# EAGLE board DigBPM (EAGLE 6.5.0)
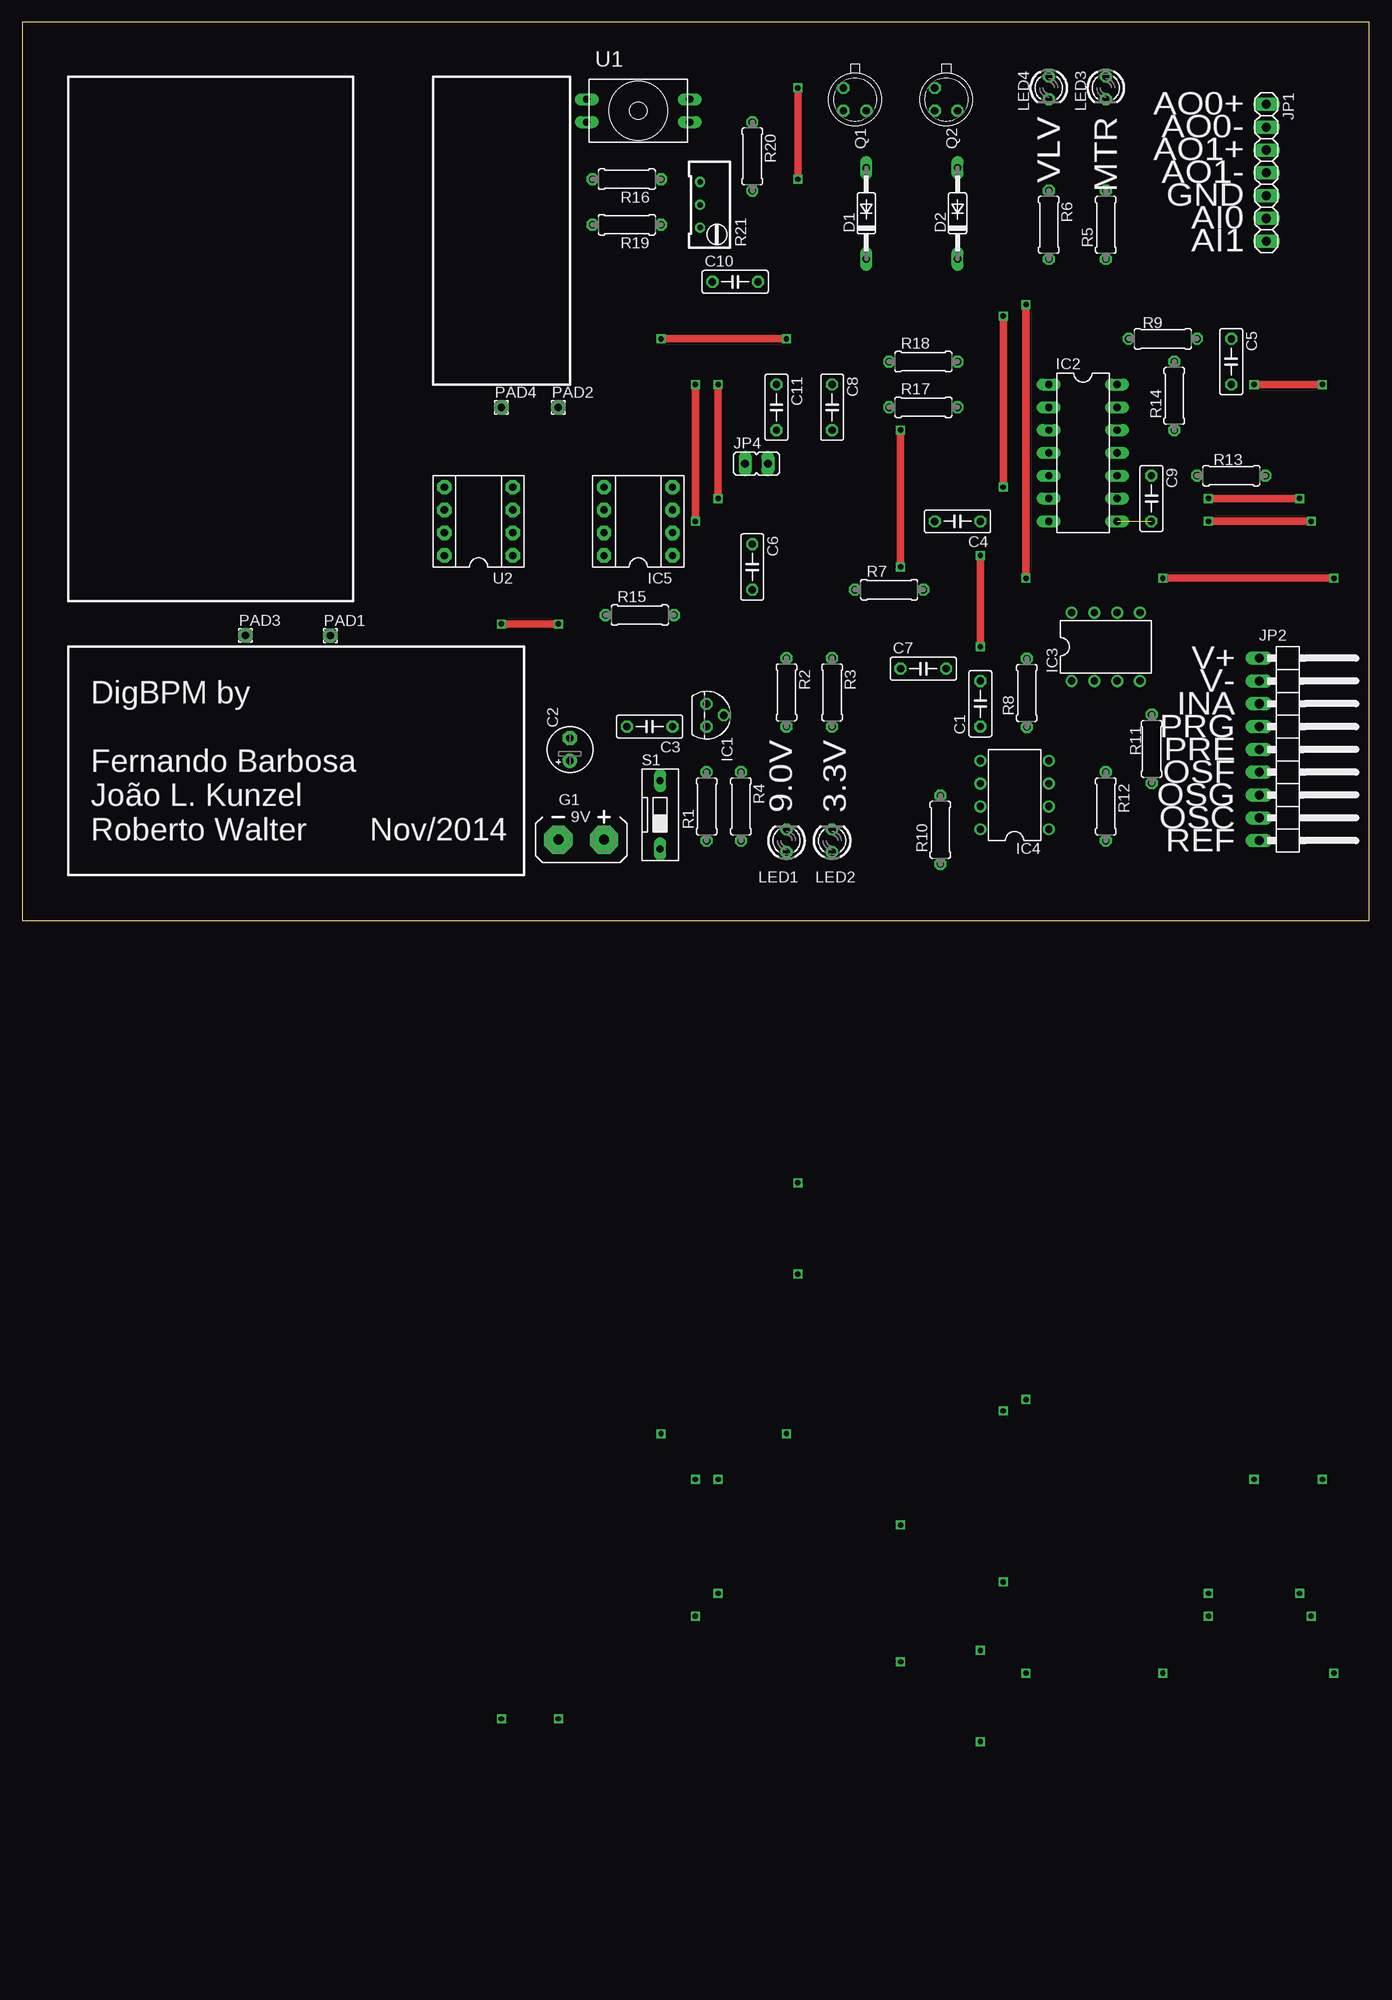
[diagram p0: board, top side]
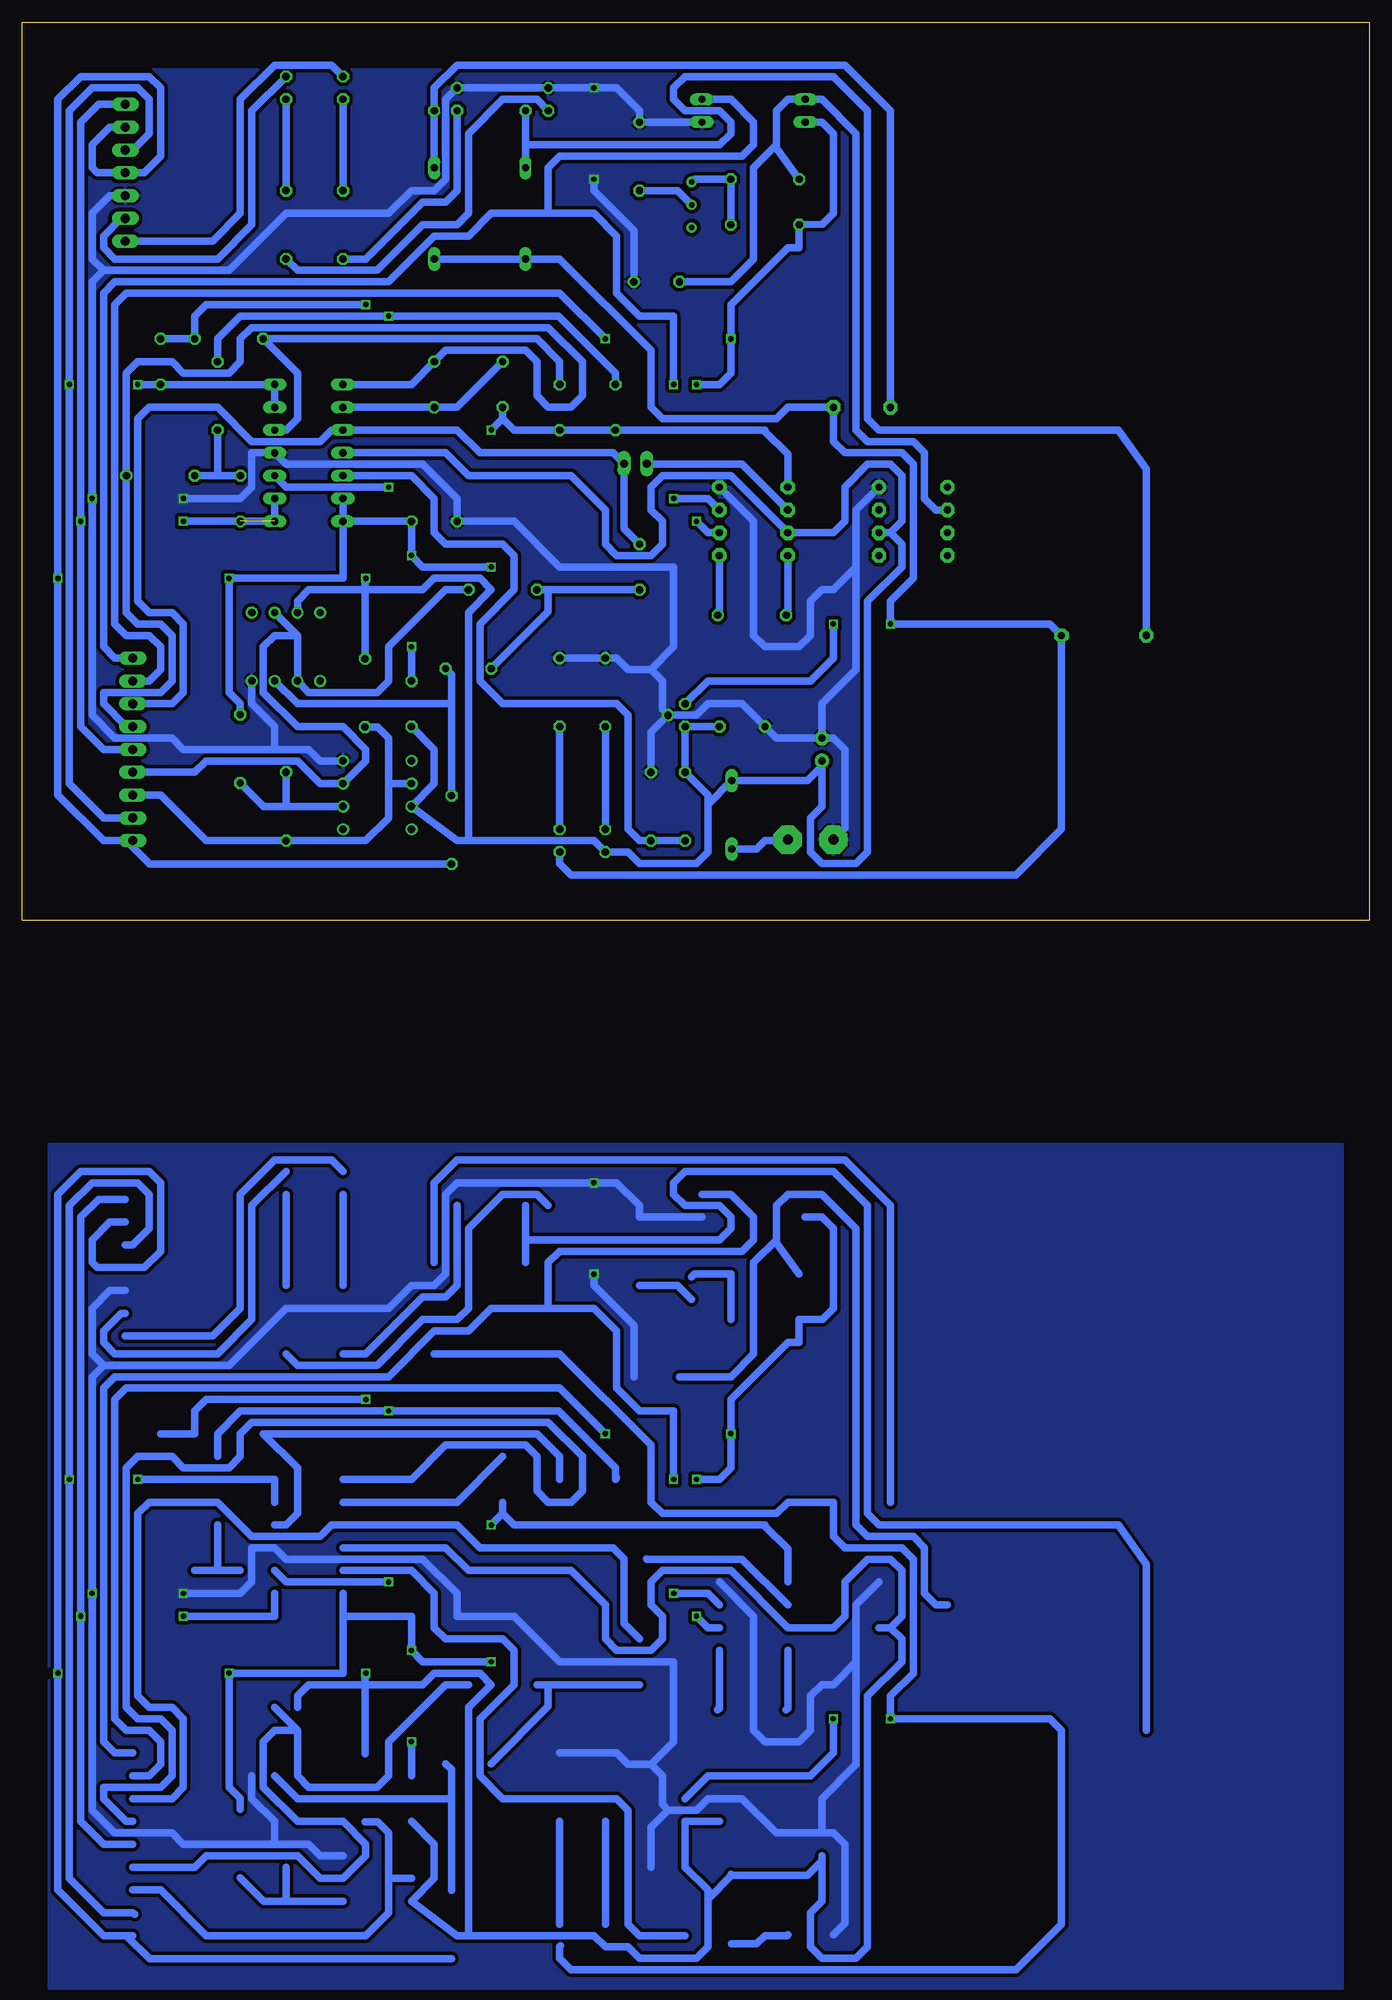
[diagram p1: board, bottom side, seen from below]

Size 150 x 100 mm. Coordinates in mm from the lower left corner, seen from the top.
Outline: 0,0 150,0 150,100 0,100 0,0
Copper layers (1*16): Top 0.035mm / dielectric 1.5mm / Bottom 0.035mm
Design rules "default *": minimum track width 32mil, minimum drill 32mil, track to track 16mil, track to pad 16mil, pad to pad 16mil, via to via 16mil, smd to smd 16mil, copper to edge 5mm, drill to drill 16mil, minimum pad ring 10mil, minimum via ring 8mil, stop-mask expansion 4mil, vias tented up to drill 0mil, thermal gap 10mil

## Footprints (pad centres in the part's own frame; a part is rotated, then mirrored left to right if it is on the bottom)
C050-025X075 = drill 0.813 octagon: 1 -2.54,0; 2 2.54,0
E2,5-5 = drill 0.813 pad 1.6: + -1.27,0 | drill 0.813 pad 1.6 octagon: - 1.27,0
DO35-10 = drill 0.813 long: A 5.08,0; C -5.08,0
AB9V = drill 1.118 pad 3.15 octagon: + 0,2.54; - 0,-2.54
TO92 = drill 0.813 octagon: 1 -1.27,0; 2 0,1.905; 3 1.27,0
DIL14 = drill 0.813 long: 1 -7.62,-3.81; 2 -5.08,-3.81; 3 -2.54,-3.81; 4 0,-3.81; 5 2.54,-3.81; 6 5.08,-3.81; 7 7.62,-3.81; 8 7.62,3.81; 9 5.08,3.81; 10 2.54,3.81; 11 0,3.81; 12 -2.54,3.81; 13 -5.08,3.81; 14 -7.62,3.81
DIL08 = drill 0.813 pad 1.27: 1 -3.81,-3.81; 2 -1.27,-3.81; 3 1.27,-3.81; 4 3.81,-3.81; 5 3.81,3.81; 6 1.27,3.81; 7 -1.27,3.81; 8 -3.81,3.81
DIL08' = drill 0.813 pad 1.6 octagon: 1 -3.81,-3.81; 2 -1.27,-3.81; 3 1.27,-3.81; 4 3.81,-3.81; 5 3.81,3.81; 6 1.27,3.81; 7 -1.27,3.81; 8 -3.81,3.81
1X07 = drill 1.016 long: 1 -7.62,0; 2 -5.08,0; 3 -2.54,0; 4 0,0; 5 2.54,0; 6 5.08,0; 7 7.62,0
1X09/90 = drill 1.016 long: 1 -10.16,-3.81; 2 -7.62,-3.81; 3 -5.08,-3.81; 4 -2.54,-3.81; 5 0,-3.81; 6 2.54,-3.81; 7 5.08,-3.81; 8 7.62,-3.81; 9 10.16,-3.81
JP1 = drill 0.914 long: 1 0,-1.27; 2 0,1.27
LED3MM = drill 0.813 octagon: A -1.27,0; K 1.27,0
1,6/0,8 = drill 0.813 pad 1.6 octagon: 1 0,0
TO18 = drill 0.813 octagon: 1 -1.27,-1.27; 2 1.27,-1.27; 3 1.27,1.27
0207/7 = drill 0.813 octagon: 1 -3.81,0; 2 3.81,0
RTRIM64W = drill 0.61: 1 1.27,-2.54; 2 1.27,0; 3 1.27,2.54
DS-01 = drill 0.813 long: 1 0,-3.81; 2 0,3.81
TBP_AN = drill 0.813 long: 1 -5.75,1.27; 2 -5.75,-1.27; 3 5.75,-1.27; 4 5.75,1.27

## Placement (x,y rotation side)
C1  100n  [C050-025X075]  106.68,24.13 90 top
C2  10u  [E2,5-5]  60.96,19.05 90 top
C3  100n  [C050-025X075]  69.85,21.59 180 top
C4  100n  [C050-025X075]  104.14,44.45 180 top
C5  100n  [C050-025X075]  134.62,62.23 270 top
C6  10u  [C050-025X075]  81.28,39.37 270 top
C7  10u  [C050-025X075]  100.33,28.04 0 top
C8  47n  [C050-025X075]  90.17,57.15 270 top
C9  100nF  [C050-025X075]  125.73,46.99 270 top
C10  100n  [C050-025X075]  79.38,71.12 0 top
C11  47nF  [C050-025X075]  83.97,57.15 270 top
D1  1N4148DO35-10  [DO35-10]  93.98,78.74 90 top
D2  1N4148DO35-10  [DO35-10]  104.14,78.74 90 top
G1  AB9V  [AB9V]  62.23,9 270 top
IC1  7805L  [TO92]  76.2,22.86 270 top
IC2  TL084P  [DIL14]  118.11,52.07 270 top
IC3  OP07Z  [DIL08]  120.65,30.48 0 top
IC4  OP07Z  [DIL08]  110.49,13.97 90 top
IC5  INA126P  [DIL08']  68.58,44.45 90 top
JP1  [1X07]  138.54,83.26 270 top
JP2  [1X09/90]  141.54,19.05 270 top
JP4  [JP1]  81.75,50.86 270 top
LED1  [LED3MM]  85.09,8.89 90 top
LED2  [LED3MM]  90.17,8.89 90 top
LED3  [LED3MM]  120.65,92.71 270 top
LED4  [LED3MM]  114.3,92.71 270 top
PAD1  [1,6/0,8]  34.29,31.73 0 top
PAD2  [1,6/0,8]  59.69,57.15 0 top
PAD3  [1,6/0,8]  24.84,31.75 0 top
PAD4  [1,6/0,8]  53.34,57.15 0 top
Q1  2N2222  [TO18]  92.71,91.44 270 top
Q2  2N2222  [TO18]  102.87,91.44 270 top
R1  470k  [0207/7]  76.2,12.7 90 top
R2  680  [0207/7]  85.09,25.4 270 top
R3  150  [0207/7]  90.17,25.4 270 top
R4  470K  [0207/7]  80.01,12.7 270 top
R5  330  [0207/7]  120.65,77.47 90 top
R6  330  [0207/7]  114.3,77.47 270 top
R7  27k  [0207/7]  96.52,36.83 0 top
R8  82k  [0207/7]  111.85,25.34 90 top
R9  150k  [0207/7]  127,64.77 180 top
R10  56k  [0207/7]  102.22,10.1 90 top
R11  1k  [0207/7]  125.76,19.11 270 top
R12  180k  [0207/7]  120.65,12.7 270 top
R13  82k  [0207/7]  134.62,49.53 180 top
R14  150k  [0207/7]  128.27,58.42 90 top
R15  1k  [0207/7]  68.76,34.01 0 top
R16  100k  [0207/7]  67.31,82.55 180 top
R17  100k  [0207/7]  100.33,57.15 0 top
R18  270k  [0207/7]  100.33,62.23 0 top
R19  470K  [0207/7]  67.31,77.47 180 top
R20  100k  [0207/7]  81.28,85.09 270 top
R21  20k  [RTRIM64W]  76.75,79.7 180 top
S1  [DS-01]  71.01,11.77 0 top
U1  TBPDANS005PG  [TBP_AN]  68.58,90.17 0 top
U2  REF02  [DIL08']  50.8,44.45 90 top

## Library data of the parts
C1-C11 R1-R21 = rcl
D1 D2 = diode
G1 = battery
IC1-IC4 = linear
IC5 = burr-brown; MF: TEXAS INSTRUMENT CONNECTORS; MPN: INA126P; OC_FARNELL: 1509595; OC_NEWARK: 74C9780
JP1 JP2 = pinhead
JP4 = jumper
LED1-LED4 = led
PAD1-PAD4 = wirepad
Q1 Q2 = transistor-npn
S1 = switch-dil; OC_FARNELL: unknown; OC_NEWARK: unknown
U1 = honeywell
U2 = custom

## Nets
4.5V: C1.2 C4.1 C8.2 C11.2 IC2.6 IC2.7 IC5.5 JP1.2 JP1.4 JP2.9 R10.1 R11.1 R17.1
+3V3: D1.C D2.C IC1.1 LED2.A PAD1.1 PAD2.1
+9V: C1.1 C2.+ C3.1 IC1.3 IC2.4 IC3.7 IC4.7 IC5.7 LED1.A R1.2 S1.2 U2.2
GND: C2.- C3.2 C4.2 C10.2 G1.- IC1.2 IC2.11 IC3.4 IC4.4 IC5.4 JP1.5 Q1.1 Q2.1 R2.1 R3.1 R4.1 R20.1 U1.3 U2.4
INA: C6.1 IC2.3 JP2.3 JP4.2
MTR: JP1.6 LED3.A
N$1: IC2.5 R1.1 R4.2
N$2: LED3.K R5.2
N$3: IC5.1 R15.2
N$4: IC5.8 R15.1
N$5: C11.1 IC2.10 R14.2
N$6: C9.1 R13.2 R14.1
N$8: IC5.6 JP4.1
N$9: C7.2 IC3.3 R10.2
N$10: C5.1 R8.2 R9.1
N$11: IC2.2 R17.2 R18.1
N$12: D2.A PAD4.1 Q2.3
N$13: LED4.K R6.1
N$17: C6.2 C7.1 R7.1
N$18: LED2.K R3.2
N$19: IC4.2 R11.2 R12.1
N$20: C8.1 IC2.12 R9.2
N$21: LED1.K R2.2
N$22: D1.A PAD3.1 Q1.3
N$23: G1.+ S1.1
N$24: Q1.2 R5.1
N$25: Q2.2 R6.2
N$26: R16.1 R19.1 R21.1
N$30: R20.2 R21.2
OSC: C5.2 IC2.13 IC2.14 JP1.3 JP2.8
OSF: IC3.2 IC3.6 IC4.3 JP2.6 R7.2
OSG: IC4.6 JP2.7 R8.1 R12.2
PRE: C9.2 IC2.8 IC2.9 JP1.1 JP2.5
PRG: IC2.1 JP2.4 R13.1 R18.2
V+: IC5.3 JP2.1 U1.4
V-: IC5.2 JP2.2 R19.2 U1.2
VCC: C10.1 R16.2 U1.1 U2.6
VLV: JP1.7 LED4.A

## Tracks (layer width: path | path; a pad name or v marks a point on that pad's centre or on a via)
4.5V  (via drill 0.6)
  Top 0.813: v127,38.1 v146.05,38.1 | v106.68,30.48 v106.68,40.64 | v97.79,39.37 v97.79,54.61
  Bottom 0.813: 138.43,8.89 140.97,8.89 146.05,13.97 v146.05,38.1 146.05,91.44 143.51,93.98 135.89,93.98 134.62,92.71 134.62,85.09 136.45,83.26 JP1.4 141.68,83.26 142.24,83.82 142.24,86.36 140.26,88.34 JP1.2 | 138.43,8.89 JP2.9 | IC5.5 64.77,51.92 67.31,54.46 67.31,54.61 C11.2 C8.2 95.25,54.61 96.52,55.88 | R10.1 135.83,6.29 138.43,8.89 | IC2.7 C4.1 v106.68,40.64 105.41,39.37 v97.79,39.37 | IC2.6 IC2.7 | C1.2 v106.68,30.48 | 96.52,55.88 R17.1 | IC2.7 114.3,38.1 v127,38.1 127,25.4 125.76,24.16 R11.1 | v97.79,54.61 96.52,55.88
4.5V1  (via drill 0.6)
  Bottom 0.813: 138.43,-113.03 140.97,-113.03 146.05,-107.95 v146.05,-83.82 146.05,-30.48 143.51,-27.94 135.89,-27.94 134.62,-29.21 134.62,-36.83 136.45,-38.66 141.68,-38.66 142.24,-38.1 142.24,-35.56 140.26,-33.58 138.54,-33.58 | 138.43,-113.03 137.73,-113.03 | 64.77,-73.66 64.77,-70 67.31,-67.46 67.31,-67.31 95.25,-67.31 96.52,-66.04 | 102.22,-115.63 135.83,-115.63 138.43,-113.03 | 114.3,-77.47 106.68,-77.47 v106.68,-81.28 105.41,-82.55 v97.79,-82.55 | 114.3,-74.93 114.3,-77.47 | 106.68,-95.25 v106.68,-91.44 | 96.52,-66.04 96.52,-64.77 | 114.3,-77.47 114.3,-83.82 v127,-83.82 127,-96.52 125.76,-97.76 125.76,-99 | v97.79,-67.31 96.52,-66.04
+3V1  (via drill 0.6)
  Bottom 0.813: 90.06,-114.19 90.17,-114.3 90.17,-115.57 88.9,-116.84 39.37,-116.84 34.29,-111.76 34.29,-90.19 35.58,-88.9 v53.34,-88.9 53.34,-86.36 50.8,-83.82 50.8,-71.12 52.07,-69.85 58.42,-69.85 59.69,-68.58 59.69,-64.77 64.77,-64.77 66.04,-66.04 78.74,-66.04 80.01,-64.77 80.01,-58.42 90.17,-48.26 104.14,-48.26 | v59.69,-88.9 59.69,-92.71 62.23,-95.25 73.66,-95.25 76.2,-97.79
+3V3  (via drill 0.6)
  Top 0.813: v59.69,33.02 v53.34,33.02
  Bottom 0.813: 90.06,7.73 LED2.A 90.17,6.35 88.9,5.08 39.37,5.08 34.29,10.16 PAD1.1 35.58,33.02 v53.34,33.02 53.34,35.56 50.8,38.1 50.8,50.8 52.07,52.07 58.42,52.07 59.69,53.34 PAD2.1 64.77,57.15 66.04,55.88 78.74,55.88 80.01,57.15 80.01,63.5 90.17,73.66 D1.C D2.C | v59.69,33.02 59.69,29.21 62.23,26.67 73.66,26.67 IC1.1
+9V
  Bottom 0.813: 73.66,12.93 73.66,7.62 74.93,6.35 81.28,6.35 82.55,7.62 LED1.A 86.36,8.89 100.33,8.89 | 73.66,12.93 S1.2 | S1.2 62.57,15.58 60.96,17.19 C2.+ 60.96,12.7 62.23,11.43 62.23,7.62 60.96,6.35 57.15,6.35 55.88,7.62 55.88,35.56 52.07,39.37 52.07,41.91 53.34,43.18 | 73.66,12.93 73.66,13.97 R1.2 IC1.3 C3.1 | 71.12,15.69 S1.2 | U2.2 53.34,43.18 | 53.34,43.18 52.07,44.45 52.07,49.53 53.34,50.8 55.88,50.8 58.42,48.26 58.42,44.45 59.69,43.18 IC5.7 71.12,49.53 78.74,49.53 80.01,48.26 80.01,45.72 78.74,44.45 78.74,41.91 80.01,40.64 83.82,40.64 85.09,41.91 85.09,45.72 88.9,49.53 100.33,49.53 102.87,52.07 IC2.4 | 100.33,8.89 101.6,8.89 IC4.7 104.14,15.24 104.14,19.05 C1.1 | IC3.7 119.38,35.56 118.11,36.83 105.41,36.83 104.14,38.1 99.06,38.1 97.79,36.83 100.33,34.29 100.33,8.89
+9V1
  Bottom 0.813: 73.66,-108.99 73.66,-114.3 74.93,-115.57 81.28,-115.57 82.55,-114.3 85.09,-114.3 86.36,-113.03 100.33,-113.03 | 73.66,-108.99 71.01,-106.34 | 71.01,-106.34 62.57,-106.34 60.96,-104.73 | 73.66,-108.99 73.66,-107.95 76.2,-105.41 76.2,-100.33 72.39,-100.33 | 60.96,-104.14 60.96,-104.73 | 71.12,-106.23 71.01,-106.34 | 60.96,-104.73 60.96,-109.22 62.23,-110.49 62.23,-114.3 60.96,-115.57 57.15,-115.57 55.88,-114.3 55.88,-86.36 52.07,-82.55 52.07,-80.01 53.34,-78.74 | 54.61,-78.74 53.34,-78.74 | 53.34,-78.74 52.07,-77.47 52.07,-72.39 53.34,-71.12 55.88,-71.12 58.42,-73.66 58.42,-77.47 59.69,-78.74 64.77,-78.74 71.12,-72.39 78.74,-72.39 80.01,-73.66 80.01,-76.2 78.74,-77.47 78.74,-80.01 80.01,-81.28 83.82,-81.28 85.09,-80.01 85.09,-76.2 88.9,-72.39 100.33,-72.39 102.87,-69.85 114.3,-69.85 | 100.33,-113.03 101.6,-113.03 106.68,-109.22 104.14,-106.68 104.14,-102.87 106.68,-100.33 | 119.38,-87.63 119.38,-86.36 118.11,-85.09 105.41,-85.09 104.14,-83.82 99.06,-83.82 97.79,-85.09 100.33,-87.63 100.33,-113.03
GND  (via drill 0.6)
  Top 0.813: v86.36,82.55 v86.36,92.71 | v132.08,46.99 v142.24,46.99
  Bottom 0.813: U1.3 R20.1 81.28,90.17 83.82,92.71 v86.36,92.71 Q1.1 Q2.1 102.87,91.44 102.87,82.55 104.14,81.28 106.68,81.28 109.22,78.74 120.65,78.74 127,72.39 140.97,72.39 | JP1.5 140.26,80.72 142.24,78.74 142.24,73.66 140.97,72.39 | 140.97,72.39 142.24,71.12 v142.24,46.99 142.24,22.86 139.7,20.32 133.35,20.32 132.08,19.05 121.92,19.05 | R3.1 R2.1 83.82,29.21 82.55,27.94 80.01,27.94 | R4.1 80.01,20.95 IC1.2 | C2.- 59.69,20.32 58.42,19.05 58.42,10.27 G1.- | IC1.2 78.74,23.5 78.74,26.67 80.01,27.94 | 57.15,39.37 57.15,27.94 60.96,24.13 C2.- | U2.4 57.15,45.72 57.15,39.37 | 57.15,39.37 59.69,36.83 60.96,36.83 62.23,35.56 62.23,31.75 63.5,30.48 67.31,30.48 68.58,31.75 68.58,44.45 IC5.4 | C2.- 66.04,20.32 C3.2 69.85,24.13 73.66,24.13 74.93,22.86 IC1.2 | C10.2 81.92,76.83 86.36,81.28 v86.36,82.55 | 80.01,27.94 77.47,30.48 77.47,39.37 90.17,39.37 95.25,44.45 C4.2 101.6,46.99 105.41,50.8 120.65,50.8 IC2.11 124.46,52.07 124.46,48.26 125.73,46.99 v132.08,46.99 | IC4.4 116.84,17.78 118.11,19.05 121.92,19.05 | IC3.4 124.46,24.13 121.92,21.59 121.92,19.05
  pour Bottom: 3,3 147,3 147,97 3,97
GND1  (via drill 0.6)
  Bottom 0.813: 74.33,-33.02 81.28,-33.02 81.28,-31.75 83.82,-29.21 v86.36,-29.21 101.6,-29.21 102.87,-30.48 102.87,-39.37 104.14,-40.64 106.68,-40.64 109.22,-43.18 120.65,-43.18 127,-49.53 140.97,-49.53 | 138.54,-41.2 140.26,-41.2 142.24,-43.18 142.24,-48.26 140.97,-49.53 | 140.97,-49.53 142.24,-50.8 v142.24,-74.93 142.24,-99.06 139.7,-101.6 133.35,-101.6 132.08,-102.87 121.92,-102.87 | 90.17,-92.71 83.82,-92.71 82.55,-93.98 80.01,-93.98 | 80.01,-105.41 80.01,-100.97 78.11,-99.06 | 60.96,-101.6 59.69,-101.6 58.42,-102.87 58.42,-111.65 59.69,-112.92 | 78.11,-99.06 78.74,-98.42 78.74,-95.25 80.01,-93.98 | 57.15,-82.55 57.15,-93.98 60.96,-97.79 60.96,-101.6 | 54.61,-73.66 57.15,-76.2 57.15,-82.55 | 57.15,-82.55 59.69,-85.09 60.96,-85.09 62.23,-86.36 62.23,-90.17 63.5,-91.44 67.31,-91.44 68.58,-90.17 68.58,-77.47 72.39,-73.66 | 60.96,-101.6 66.04,-101.6 69.85,-97.79 73.66,-97.79 74.93,-99.06 78.11,-99.06 | 81.92,-50.8 81.92,-45.09 86.36,-40.64 v86.36,-39.37 | 80.01,-93.98 77.47,-91.44 77.47,-82.55 90.17,-82.55 95.25,-77.47 101.6,-77.47 101.6,-74.93 105.41,-71.12 120.65,-71.12 121.92,-69.85 124.46,-69.85 124.46,-73.66 125.73,-74.93 v132.08,-74.93 | 114.3,-104.14 116.84,-104.14 118.11,-102.87 121.92,-102.87 | 124.46,-95.25 124.46,-97.79 121.92,-100.33 121.92,-102.87
  pour Bottom: 3,-118.92 147,-118.92 147,-24.92 3,-24.92
INA
  Bottom 0.813: JP2.3 133.35,24.13 132.08,25.4 132.08,33.02 133.35,34.29 135.89,34.29 137.16,35.56 137.16,55.88 135.89,57.15 128.27,57.15 124.46,53.34 116.84,53.34 115.57,54.61 IC2.3 101.6,54.61 99.06,52.07 84.23,52.07 JP4.2 83.02,43.65 C6.1
INA1
  Bottom 0.813: 137.73,-97.79 133.35,-97.79 132.08,-96.52 132.08,-88.9 133.35,-87.63 135.89,-87.63 137.16,-86.36 137.16,-66.04 135.89,-64.77 128.27,-64.77 124.46,-68.58 116.84,-68.58 115.57,-67.31 101.6,-67.31 99.06,-69.85 84.23,-69.85 83.02,-71.06 83.02,-78.27 81.28,-80.01
MTR
  Bottom 0.813: LED3.A 124.46,90.17 124.46,77.47 128.27,73.66 139.7,73.66 140.97,74.93 140.97,76.2 138.99,78.18 JP1.6
MTR1
  Bottom 0.813: 120.65,-27.94 124.46,-31.75 124.46,-44.45 128.27,-48.26 139.7,-48.26 140.97,-46.99 140.97,-45.72 138.99,-43.74 138.54,-43.74
N$1
  Bottom 0.813: R1.1 R4.2 81.28,8.89 82.55,10.16 82.55,22.86 83.82,24.13 96.52,24.13 99.06,26.67 99.06,33.02 95.25,36.83 95.25,40.64 96.52,41.91 102.87,41.91 104.14,43.18 104.14,46.99 106.68,49.53 IC2.5
N$2
  Bottom 0.813: R5.2 LED3.K
N$3
  Bottom 0.813: IC5.1 72.39,34.19 R15.2
N$4
  Bottom 0.813: IC5.8 64.77,34.19 R15.1
N$5  (via drill 0.6)
  Top 0.813: v109.22,48.26 v109.22,67.31
  Bottom 0.813: R14.2 128.27,64.77 125.73,67.31 v109.22,67.31 90.32,67.31 83.97,60.96 C11.1 83.82,59.84 | IC2.10 120.65,48.26 v109.22,48.26
N$6
  Bottom 0.813: C9.1 128.27,49.53 | 128.27,49.53 R13.2 | R14.1 128.27,49.53
N$7  (via drill 0.6)
  other vias: 53.34,33.02
N$8
  Bottom 0.813: JP4.1 80.42,50.8 69.85,50.8 IC5.6
N$9
  Bottom 0.813: R10.2 102.22,24.13 | 102.22,24.13 102.22,27.39 C7.2 | IC3.3 119.38,24.13 102.22,24.13
N$10  (via drill 0.6)
  Top 0.813: v111.76,68.58 v111.76,38.1
  Bottom 0.813: C5.1 R9.1 130.81,67.31 129.54,68.58 v111.76,68.58 | R8.2 111.85,38.01 v111.76,38.1
N$11
  Bottom 0.813: IC2.2 R17.2 101.6,57.15 R18.1
N$12
  Bottom 0.813: D2.A Q2.3 104.14,92.71 101.6,95.25 58.42,95.25 53.34,90.17 PAD4.1
N$13
  Bottom 0.813: R6.1 LED4.K
N$14
  Bottom 0.813: 72.39,-81.28 72.39,-87.73 72.57,-87.91
N$15
  Bottom 0.813: 64.77,-81.28 64.77,-87.73 64.95,-87.91
N$16
  Bottom 0.813: 125.73,-72.39 128.27,-72.39 | 128.27,-72.39 130.81,-72.39 | 128.27,-67.31 128.27,-72.39
N$17
  Bottom 0.813: 91.44,36.83 C6.2 | C7.1 91.44,34.39 91.44,36.83 | 91.44,36.83 R7.1
N$18
  Bottom 0.813: R3.2 LED2.K
N$19
  Bottom 0.813: IC4.2 120.65,12.7 | 120.65,12.7 123.16,12.7 R11.2 | R12.1 120.65,12.7
N$20
  Bottom 0.813: C8.1 90.17,62.23 92.71,64.77 R9.2 119.38,60.96 119.38,55.88 120.65,54.61 IC2.12
N$21
  Bottom 0.813: R2.2 LED1.K
N$22
  Bottom 0.813: D1.A 93.98,86.36 | 93.98,86.36 Q1.3 | PAD3.1 24.84,50.24 27.94,54.61 54.61,54.61 55.88,55.88 55.88,90.17 59.69,93.98 76.2,93.98 77.47,92.71 77.47,91.44 76.2,90.17 72.39,90.17 71.12,88.9 71.12,87.63 72.39,86.36 93.98,86.36
N$23
  Bottom 0.813: S1.1 68.24,7.96 67.31,8.89 64.88,8.89 G1.+
N$24
  Bottom 0.813: Q1.2 92.71,91.44 96.52,91.44 100.33,87.63 100.33,78.74 101.6,77.47 105.41,77.47 110.49,72.39 119.38,72.39 R5.1
N$25
  Bottom 0.813: R6.2 111.76,73.66 105.41,80.01 102.87,80.01 101.6,81.28 Q2.2
N$26
  Bottom 0.813: R19.1 R16.1 75.17,82.55 R21.1
N$27
  Bottom 0.813: 91.44,-85.09 81.28,-85.09 | 97.79,-93.88 91.44,-87.53 91.44,-85.09 | 91.44,-85.09 92.71,-85.09
N$30
  Bottom 0.813: R21.2 77.06,81.28 R20.2
N$34  (via drill 0.6)
  Bottom 0.813: 128.27,-59.69 128.27,-57.15 125.73,-54.61 v109.22,-54.61 90.32,-54.61 83.97,-60.96 83.97,-62.23 83.82,-62.08 | 121.92,-72.39 120.65,-73.66 v109.22,-73.66
N$35
  Bottom 0.813: 102.22,-108.01 102.22,-97.79 | 102.22,-97.79 102.22,-94.53 102.87,-93.88 | 121.92,-95.25 119.38,-97.79 102.22,-97.79
N$36
  Bottom 0.813: 114.3,-64.77 101.6,-64.77 96.52,-59.69
N$37
  Bottom 0.813: 114.3,-109.22 120.65,-109.22 | 120.65,-109.22 123.16,-109.22 125.76,-106.62 | 120.65,-105.41 120.65,-109.22
N$38  (via drill 0.6)
  Bottom 0.813: 134.62,-57.15 130.81,-57.15 130.81,-54.61 129.54,-53.34 v111.76,-53.34 | 111.85,-92.77 111.85,-83.91 v111.76,-83.82
N$39
  Bottom 0.813: 90.17,-62.23 90.17,-59.69 92.71,-57.15 123.19,-57.15 119.38,-60.96 119.38,-66.04 120.65,-67.31 121.92,-67.31
N$40
  Bottom 0.813: 76.2,-113.03 81.28,-113.03 82.55,-111.76 82.55,-99.06 83.82,-97.79 96.52,-97.79 99.06,-95.25 99.06,-88.9 95.25,-85.09 95.25,-81.28 96.52,-80.01 102.87,-80.01 104.14,-78.74 104.14,-74.93 106.68,-72.39 114.3,-72.39
N$41
  Bottom 0.813: 71.01,-113.96 68.24,-113.96 67.31,-113.03 64.88,-113.03 64.77,-112.92
N$42
  Bottom 0.813: 85.09,-100.33 85.09,-111.76
N$43
  Bottom 0.813: 71.12,-44.45 71.12,-39.37 75.17,-39.37 75.48,-39.68
N$44
  Bottom 0.813: 90.17,-100.33 90.17,-111.76
N$45
  Bottom 0.813: 75.48,-42.22 77.06,-40.64 81.28,-40.64
N$46
  Bottom 0.813: 80.48,-71.06 80.42,-71.12 69.85,-71.12 64.77,-76.2
N$47
  Bottom 0.813: 91.44,-31.75 92.71,-30.48 96.52,-30.48 100.33,-34.29 100.33,-43.18 101.6,-44.45 105.41,-44.45 110.49,-49.53 119.38,-49.53 120.65,-48.26
N$48
  Bottom 0.813: 114.3,-48.26 111.76,-48.26 105.41,-41.91 102.87,-41.91 101.6,-40.64 101.6,-31.75
N$49
  Bottom 0.813: 93.98,-38.1 93.98,-35.56 | 93.98,-35.56 93.98,-31.75 | 24.84,-90.17 24.84,-71.68 27.94,-67.31 54.61,-67.31 55.88,-66.04 55.88,-31.75 59.69,-27.94 76.2,-27.94 77.47,-29.21 77.47,-30.48 76.2,-31.75 72.39,-31.75 71.12,-33.02 71.12,-34.29 72.39,-35.56 93.98,-35.56
N$50
  Bottom 0.813: 104.14,-38.1 104.14,-29.21 101.6,-26.67 58.42,-26.67 53.34,-31.75 53.34,-64.77
N$51
  Bottom 0.813: 120.65,-40.64 120.65,-30.48
N$52
  Bottom 0.813: 114.3,-40.64 114.3,-30.48
N$53  (via drill 0.6)
  other vias: 53.34,-88.9
OSC  (via drill 0.6)
  Top 0.813: v137.16,59.69 v144.78,59.69
  Bottom 0.813: JP1.3 137.72,85.8 135.89,87.63 135.89,91.44 137.16,92.71 142.24,92.71 144.78,90.17 v144.78,59.69 144.78,15.24 140.97,11.43 JP2.8 137.5,11.25 | IC2.13 IC2.14 C5.2 v137.16,59.69
OSC1  (via drill 0.6)
  Bottom 0.813: 138.54,-36.12 137.72,-36.12 135.89,-34.29 135.89,-30.48 137.16,-29.21 142.24,-29.21 144.78,-31.75 v144.78,-62.23 144.78,-106.68 140.97,-110.49 137.73,-110.49 137.5,-110.67 | 121.92,-64.77 121.92,-62.23 v137.16,-62.23
OSF
  Bottom 0.813: JP2.6 130.81,16.51 129.54,17.78 119.38,17.78 116.84,15.24 IC4.3 111.76,17.78 111.76,19.05 114.3,21.59 119.38,21.59 123.19,25.4 123.19,30.48 121.92,31.75 119.38,31.75 | 119.38,31.75 IC3.6 | R7.2 102.87,36.83 109.22,30.48 109.22,26.67 110.49,25.4 118.11,25.4 IC3.2 119.38,31.75
OSF1
  Bottom 0.813: 137.73,-105.41 130.81,-105.41 129.54,-104.14 119.38,-104.14 116.84,-106.68 114.3,-106.68 111.76,-104.14 111.76,-102.87 114.3,-100.33 119.38,-100.33 123.19,-96.52 123.19,-91.44 121.92,-90.17 119.38,-90.17 | 119.38,-90.17 121.92,-87.63 | 100.33,-85.09 102.87,-85.09 109.22,-91.44 109.22,-95.25 110.49,-96.52 118.11,-96.52 119.38,-95.25 119.38,-90.17
OSG
  Bottom 0.813: JP2.7 134.62,13.97 129.54,8.89 R12.2 111.76,8.89 109.22,11.43 109.22,15.24 | 109.22,15.24 IC4.6 | R8.1 110.43,21.53 109.22,20.32 109.22,15.24
OSG1
  Bottom 0.813: 137.73,-107.95 134.62,-107.95 129.54,-113.03 111.76,-113.03 109.22,-110.49 109.22,-106.68 | 109.22,-106.68 106.68,-106.68 | 111.85,-100.39 110.43,-100.39 109.22,-101.6 109.22,-106.68
PRE  (via drill 0.6)  (1 unrouted)
  Top 0.813: v132.08,44.45 v143.51,44.45
  Bottom 0.813: JP1.1 141.53,90.88 143.51,88.9 v143.51,44.45 143.51,21.59 140.97,19.05 JP2.5 | IC2.9 IC2.8 v132.08,44.45
PRE1  (via drill 0.6)
  Bottom 0.813: 138.54,-31.04 141.53,-31.04 143.51,-33.02 v143.51,-77.47 143.51,-100.33 140.97,-102.87 137.73,-102.87 | 121.92,-74.93 121.92,-77.47 v132.08,-77.47
PRG
  Bottom 0.813: IC2.1 106.68,59.69 R18.2 102.87,63.5 93.98,63.5 92.71,62.23 92.71,58.42 91.44,57.15 88.9,57.15 87.63,58.42 87.63,62.23 91.44,66.04 124.46,66.04 125.73,64.77 125.73,62.23 127,60.96 132.08,60.96 133.35,62.23 137.16,62.23 138.43,60.96 R13.1 138.43,34.29 137.16,33.02 134.62,33.02 133.35,31.75 133.35,26.67 134.62,25.4 140.97,25.4 140.97,24.13 138.43,21.59 JP2.4
PRG1
  Bottom 0.813: 114.3,-62.23 106.68,-62.23 102.87,-58.42 93.98,-58.42 92.71,-59.69 92.71,-63.5 91.44,-64.77 88.9,-64.77 87.63,-63.5 87.63,-59.69 91.44,-55.88 124.46,-55.88 125.73,-57.15 125.73,-59.69 127,-60.96 132.08,-60.96 133.35,-59.69 137.16,-59.69 138.43,-60.96 138.43,-87.63 137.16,-88.9 134.62,-88.9 133.35,-90.17 133.35,-95.25 134.62,-96.52 140.97,-96.52 140.97,-97.79 138.43,-100.33 137.73,-100.33
V+  (via drill 0.6)
  Top 0.813: v77.47,46.99 v77.47,59.69
  Bottom 0.813: U1.4 71.12,91.44 68.58,88.9 68.58,86.36 69.85,85.09 90.17,85.09 91.44,83.82 91.44,78.74 | 91.44,78.74 97.79,78.74 100.33,76.2 104.14,76.2 109.22,71.12 139.7,71.12 140.97,69.85 140.97,30.48 139.7,29.21 JP2.1 | IC5.3 73.66,46.99 v77.47,46.99 | v77.47,59.69 77.47,67.31 81.28,67.31 83.82,69.85 83.82,76.2 86.36,78.74 91.44,78.74
V+1  (via drill 0.6)
  Bottom 0.813: 74.33,-30.48 71.12,-30.48 68.58,-33.02 68.58,-35.56 69.85,-36.83 90.17,-36.83 91.44,-38.1 91.44,-43.18 | 91.44,-43.18 97.79,-43.18 100.33,-45.72 104.14,-45.72 109.22,-50.8 139.7,-50.8 140.97,-52.07 140.97,-91.44 139.7,-92.71 137.73,-92.71 | 72.39,-76.2 73.66,-74.93 v77.47,-74.93 | v77.47,-62.23 77.47,-54.61 81.28,-54.61 83.82,-52.07 83.82,-45.72 86.36,-43.18 91.44,-43.18
V-  (via drill 0.6)
  Top 0.813: v74.93,59.69 v74.93,44.45 | v85.09,64.77 v71.12,64.77
  Bottom 0.813: U1.2 60.96,88.9 59.69,87.63 59.69,78.74 60.92,77.51 R19.2 63.5,74.93 64.77,74.93 71.12,68.58 v71.12,64.77 71.12,60.96 72.39,59.69 v74.93,59.69 | IC5.2 73.66,43.18 v74.93,44.45 | v85.09,64.77 90.17,69.85 138.43,69.85 139.7,68.58 139.7,33.02 138.43,31.75 135.89,31.75 134.62,30.48 134.62,27.94 135.89,26.67 JP2.2
V-1  (via drill 0.6)
  Bottom 0.813: 62.83,-33.02 60.96,-33.02 59.69,-34.29 59.69,-43.18 60.92,-44.41 63.5,-44.45 63.5,-46.99 64.77,-46.99 71.12,-53.34 v71.12,-57.15 71.12,-60.96 72.39,-62.23 v74.93,-62.23 | 72.39,-78.74 73.66,-78.74 v74.93,-77.47 | v85.09,-57.15 90.17,-52.07 138.43,-52.07 139.7,-53.34 139.7,-88.9 138.43,-90.17 135.89,-90.17 134.62,-91.44 134.62,-93.98 135.89,-95.25 137.73,-95.25
VCC
  Bottom 0.813: 66.04,86.36 66.04,90.17 64.77,91.44 U1.1 60.96,91.44 57.15,87.63 57.15,54.61 55.88,53.34 50.8,53.34 49.53,52.07 49.53,46.99 48.26,45.72 U2.6 | 66.04,86.36 66.04,86 R16.2 | C10.1 71.12,71.12 68.58,73.66 68.58,83.82 66.04,86.36
VCC1
  Bottom 0.813: 66.04,-35.56 66.04,-31.75 64.77,-30.48 60.96,-30.48 57.15,-34.29 57.15,-67.31 55.88,-68.58 50.8,-68.58 49.53,-69.85 49.53,-74.93 48.26,-76.2 46.99,-76.2 | 66.04,-35.56 66.04,-35.92 63.5,-39.37 | 76.83,-50.8 71.12,-50.8 68.58,-48.26 68.58,-38.1 66.04,-35.56
VLV
  Bottom 0.813: LED4.A 115.57,95.25 121.92,95.25 125.73,91.44 125.73,78.74 128.83,75.64 JP1.7
VLV1
  Bottom 0.813: 114.3,-27.94 115.57,-26.67 121.92,-26.67 125.73,-30.48 125.73,-43.18 128.83,-46.28 138.54,-46.28

## Text on the board
tNames: AO0+ | VLV | MTR | AO0- | AO1+ | AO1- | GND | AI0 | AI1 | V+ | V- | INA | PRG | PRE | OSF | OSG | 9.0V | 3.3V | OSC | DigBPM by / / Fernando Barbosa / João L. Kunzel / Roberto Walter Nov/2014 | REF